# Altium PCB lipo_board.PcbDoc
Units mil, origin at the board's own origin, x right, y up, seen from the top; angles counter-clockwise.
Board outline 2800 x 2800 mil, 2 copper layers (Top Layer, Bottom Layer); 8 components, 8 nets, 32 pads, 0 vias.
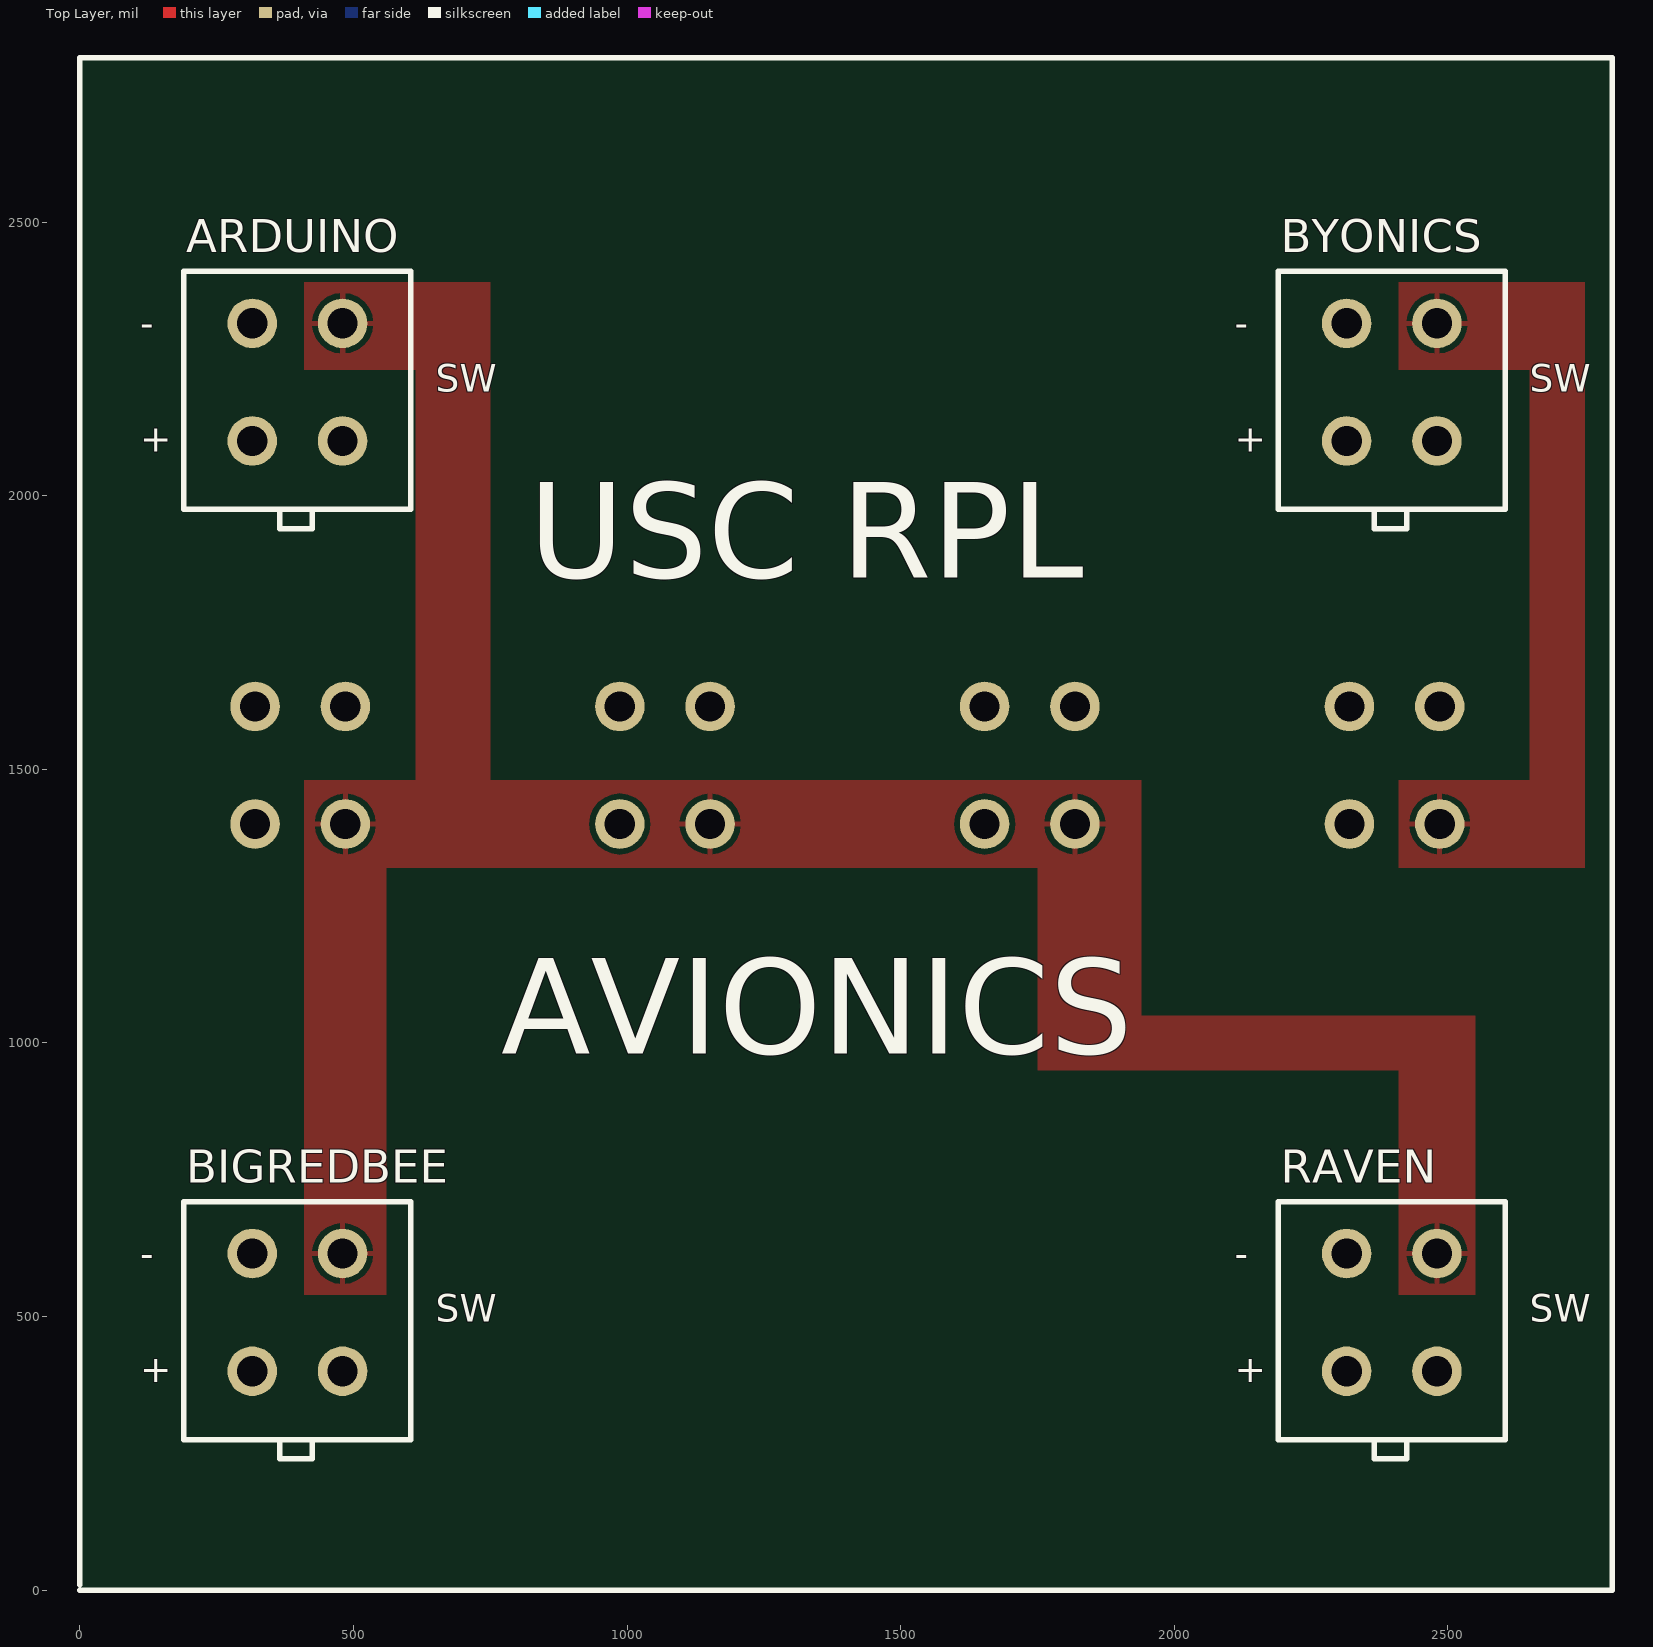
[diagram p0: Top Layer view]
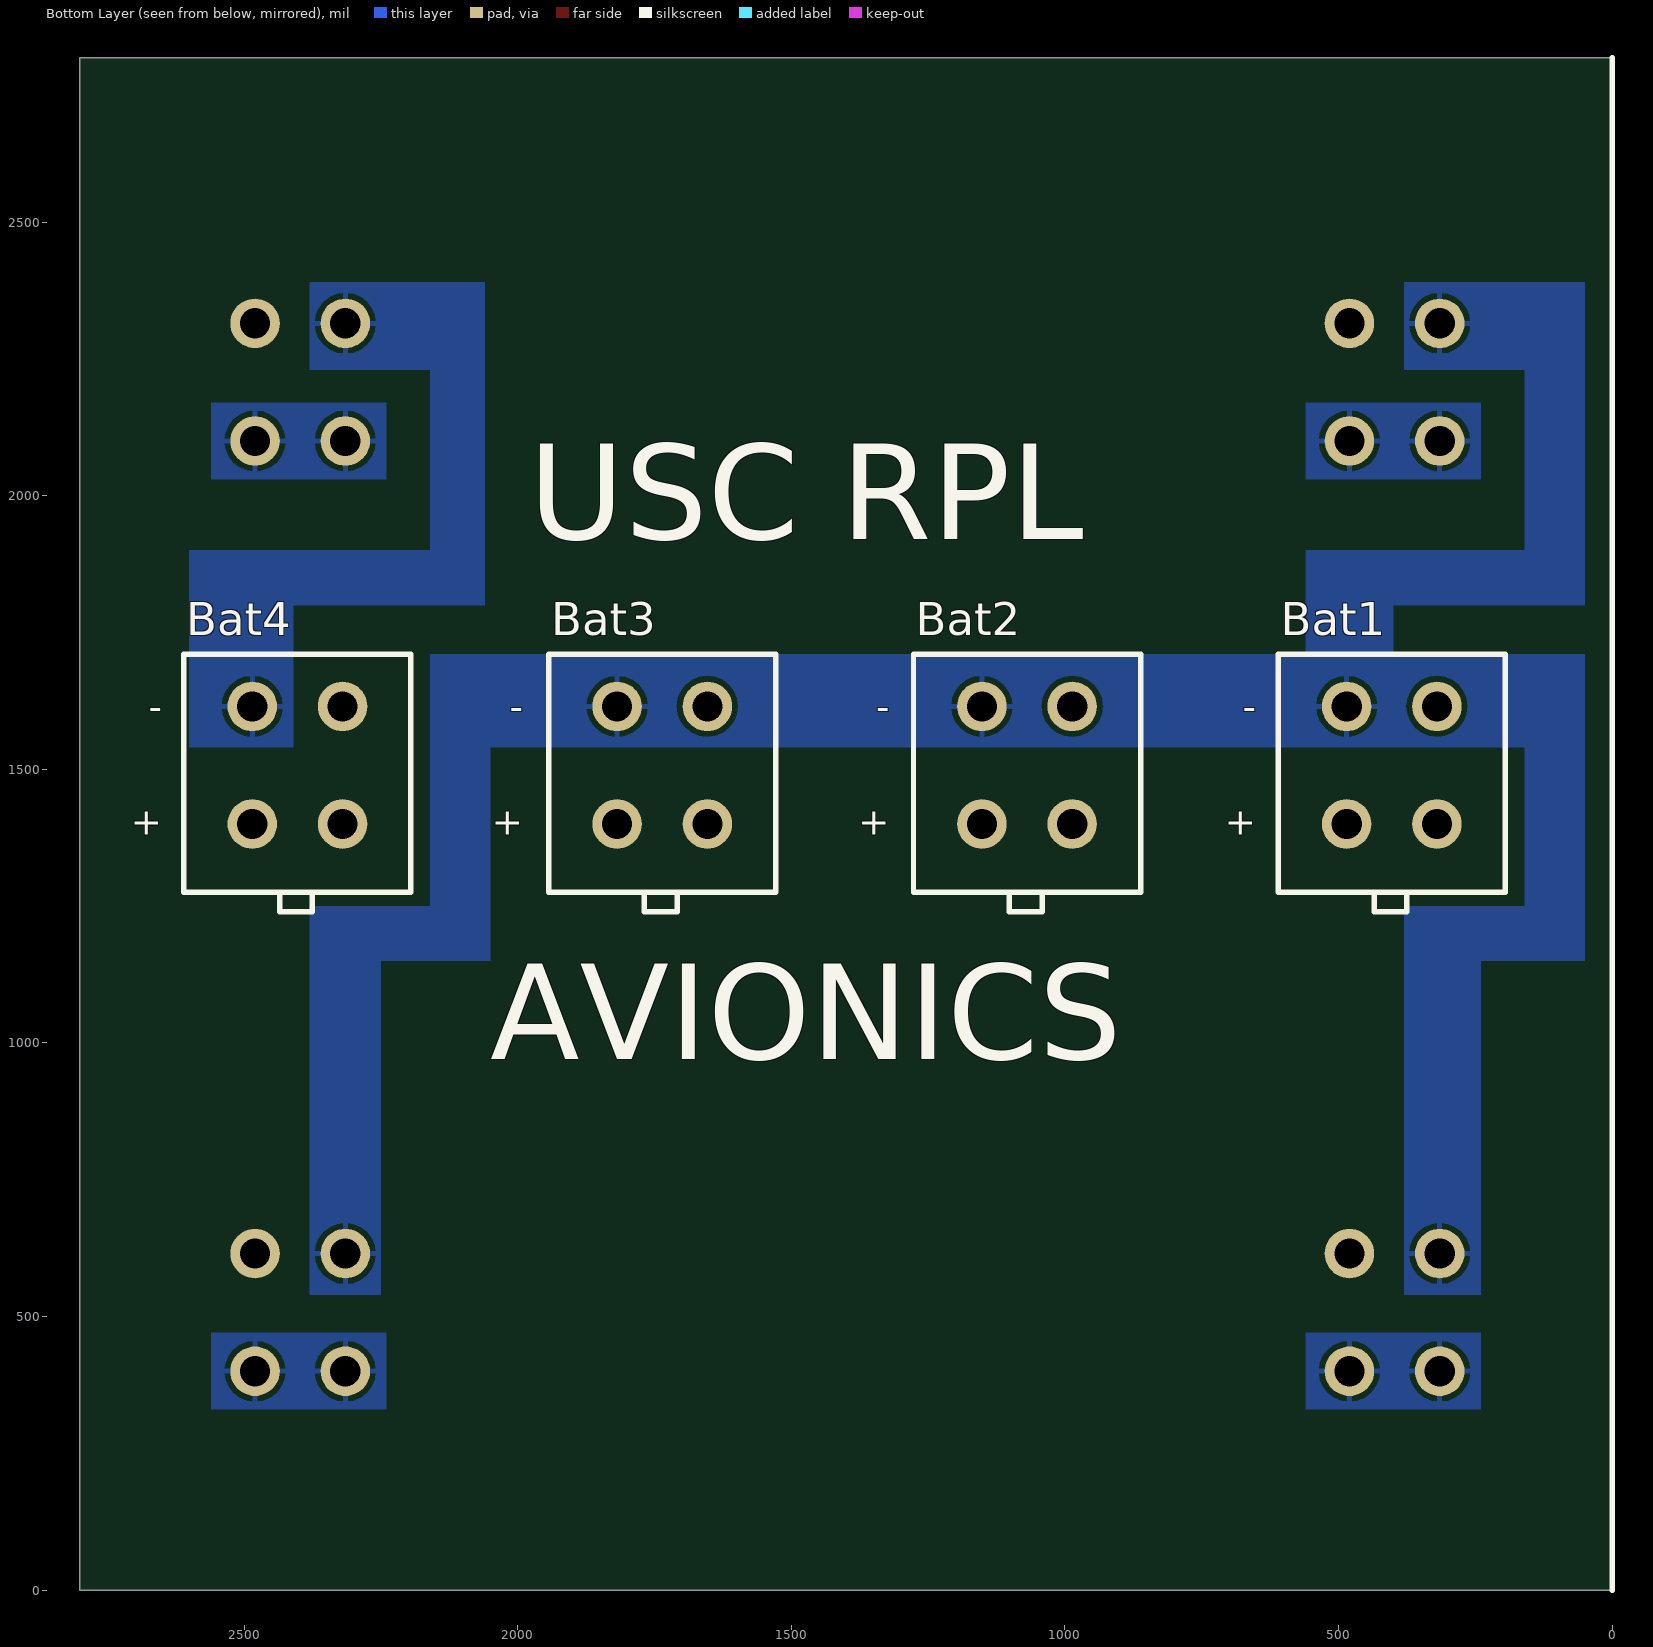
[diagram p1: Bottom Layer view, seen from below]
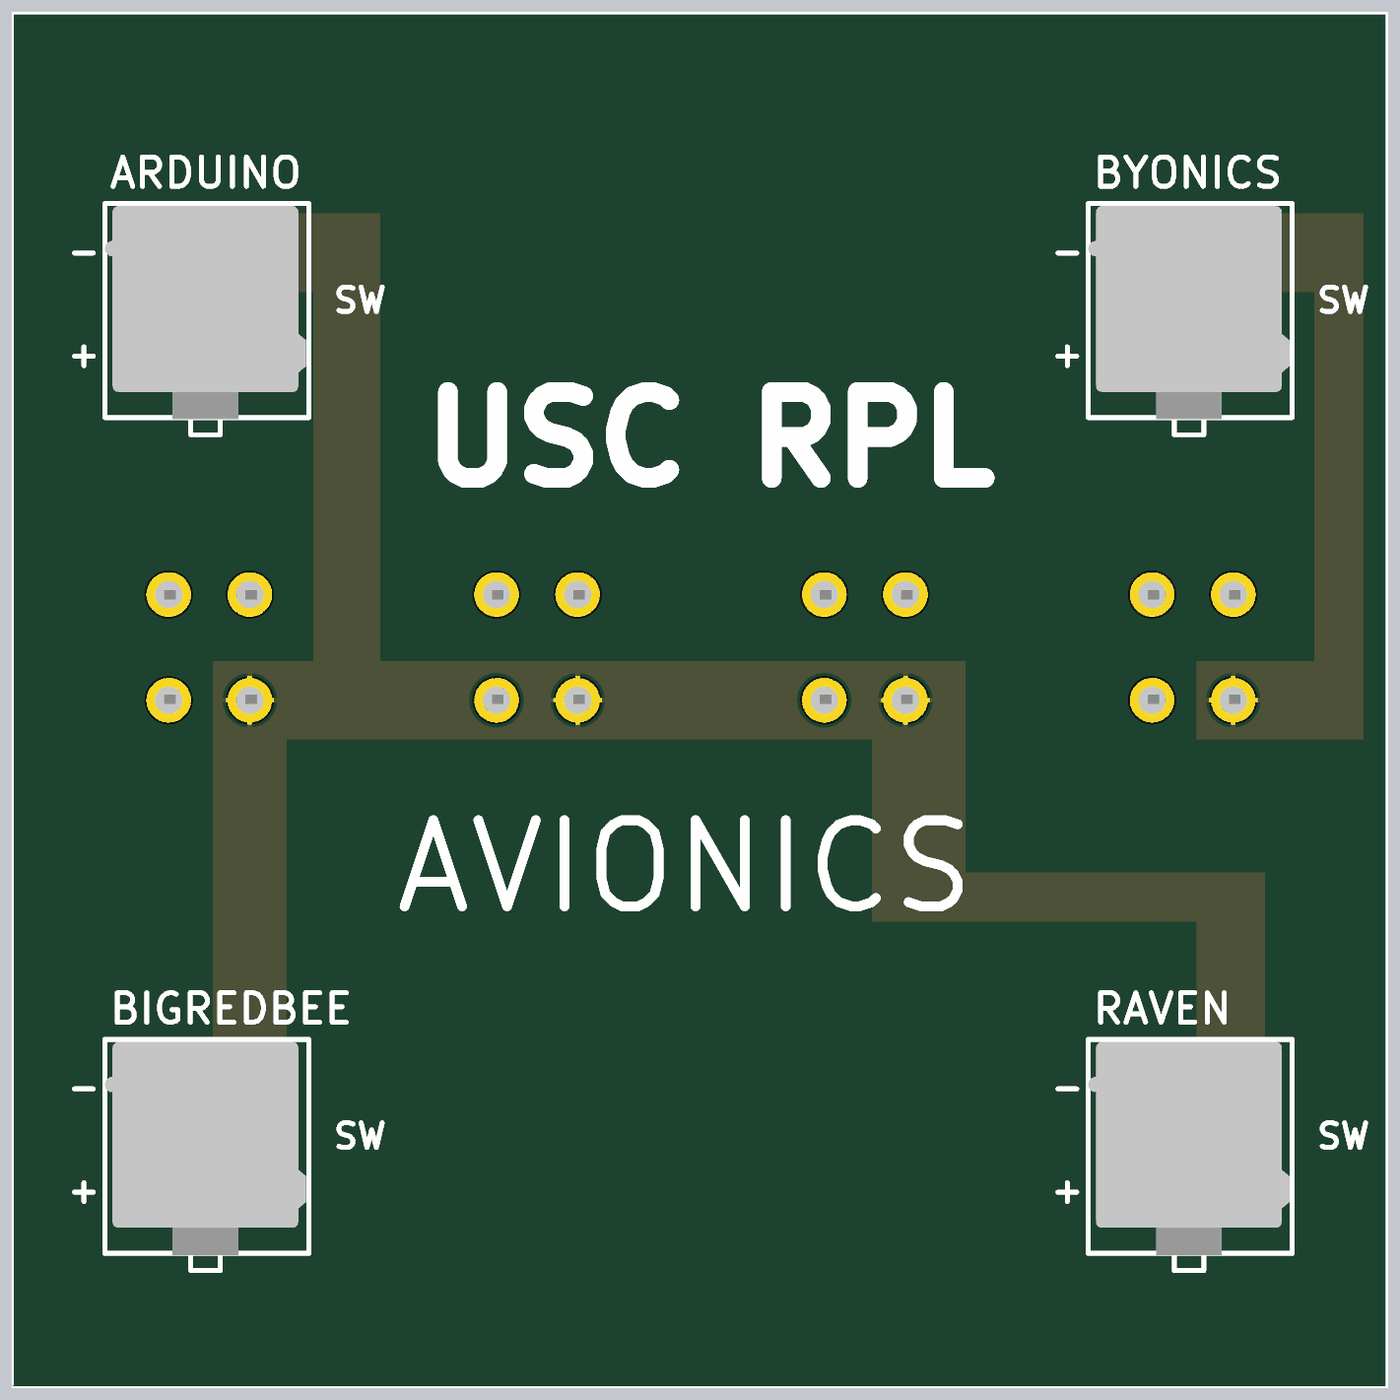
[diagram p2: 3D render of the assembled board from above, using the file's embedded part models]
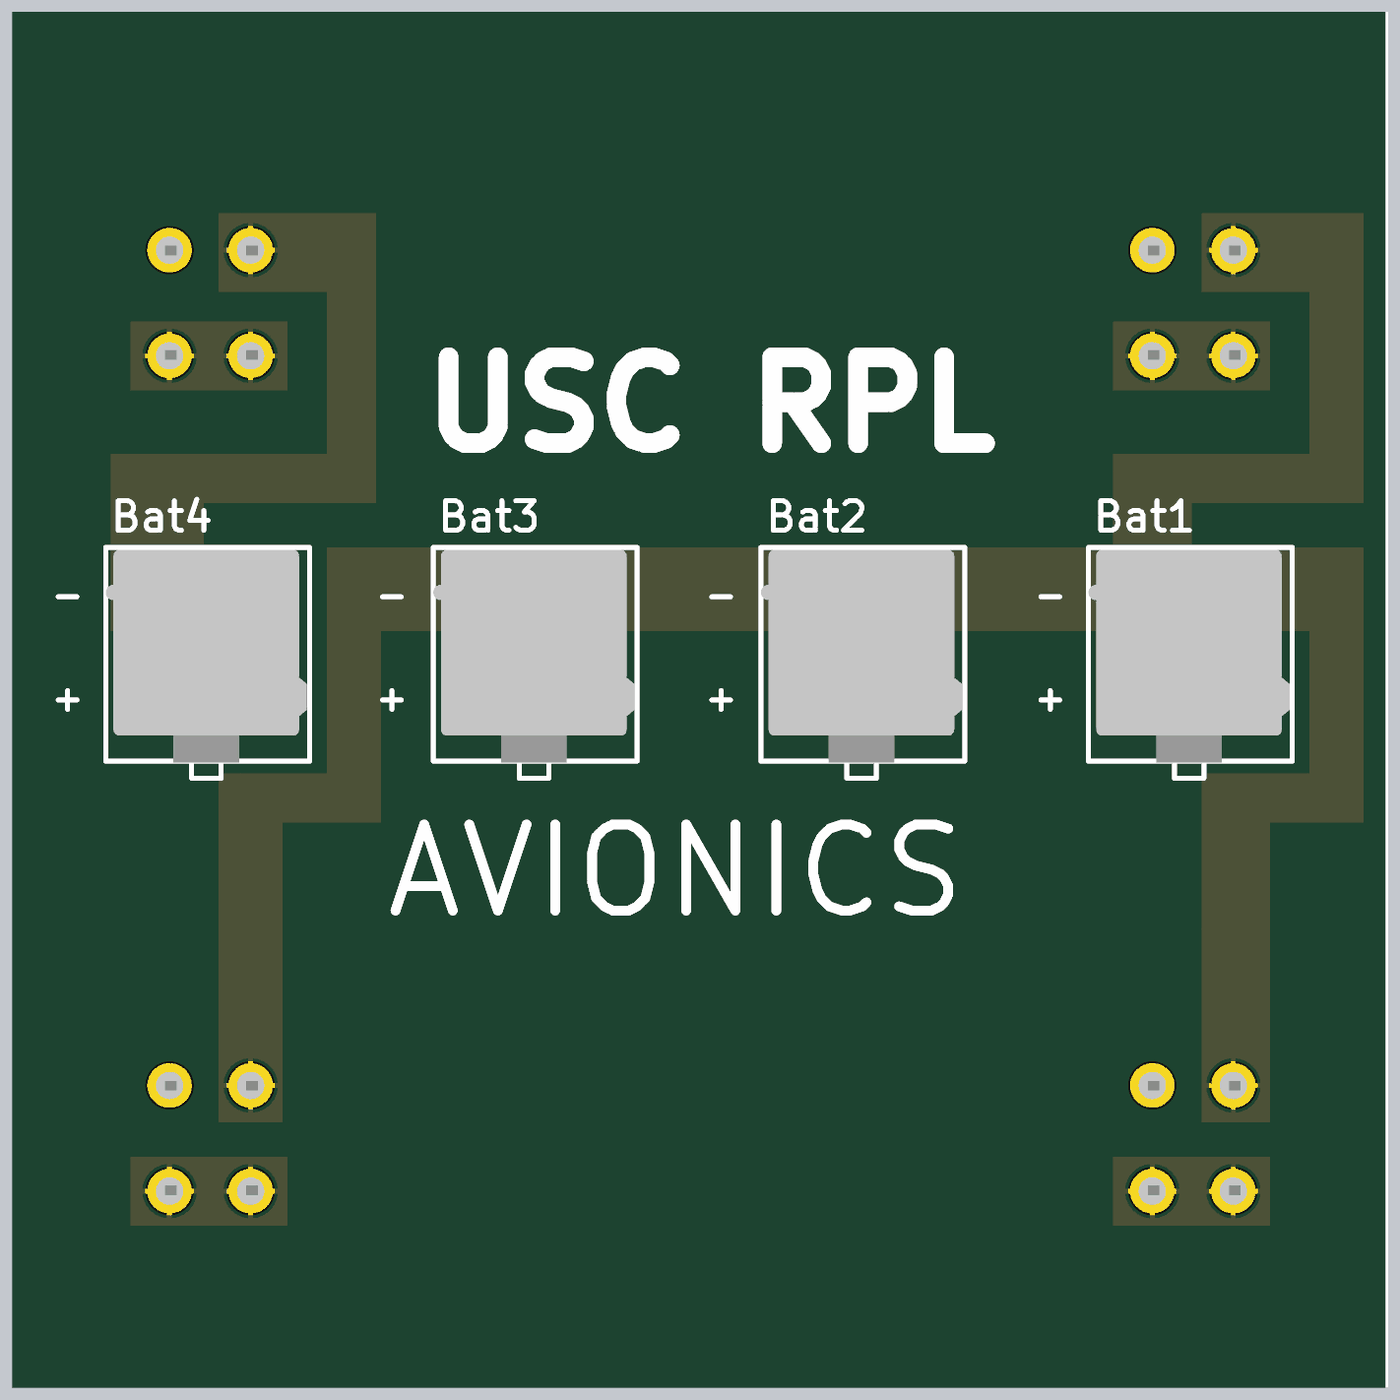
[diagram p3: 3D render of the assembled board from below, using the file's embedded part models]

## Layer stack, top to bottom
Top Layer: signal copper 1.4
Dielectric: dielectric 12.6, FR-4, Dk 4.8
Bottom Layer: signal copper 1.4

## Board outline
0,0 0,2800 2800,2800 2800,0 0,0

## Design rules (kind name [scope] priority, off if disabled: settings)
Clearance [All] p1: gap=10
PolygonConnect [All] p1: connectstyle=Relief reliefconductorwidth=10 reliefentries=4 polygonreliefangle="90 Angle"
RoomDefinition lipo_board [InComponentClass('lipo_board')] p1: confinementstyle=ConfineIn formatcopy=TRUE lockcomponents=FALSE outline 0,0 7595,0 7595,5155 0,5155
RoutingVias [All] p1: holewidth=28 width=50 viastyle="Through Hole" minholewidth=28 minwidth=50 maxholewidth=28 maxwidth=50
SilkscreenOverComponentPads [All] p1: minsilkscreentomaskgap=10
SolderMaskExpansion [All] p1: expansion=4
TestPointUsage [All] p1: valid=0 allowmultiple=FALSE
Testpoint [All] p1: side=15 testpointundercomponent=TRUE minsize=40 maxsize=100 preferedsize=60 minholesize=0 maxholesize=40 preferedholesize=32 testpointgrid=1 style=1023 order=0123456789
Width [All] p1: maxlimit=10 minlimit=10 preferedwidth=10
23 further rules are at their usual default settings.

## Components (designator, comment, footprint, x,y, rotation, side; value= is the part's Value field where it differs from the comment)
ARDUINO "5566-4" 5566-4 400,2100 r0 top
Bat1 "5566-4" 5566-4 400,1400 r180 bottom
Bat2 "5566-4" 5566-4 1066.67,1400 r180 bottom
Bat3 "5566-4" 5566-4 1733.33,1400 r180 bottom
Bat4 "5566-4" 5566-4 2400,1400 r180 bottom
BIGREDBEE "5566-4" 5566-4 400,400 r0 top
BYONICS "5566-4" 5566-4 2400,2100 r0 top
RAVEN "5566-4" 5566-4 2400,400 r0 top

## Footprints (in the part's own frame and the unit in brackets; to place one, negate y for a bottom-side part, rotate by r counter-clockwise, add the part's x,y. Pads: shape width x height; smd on the part's side, far side on the other; paste and mask are expansions set on the pad)
5566-4 [mm]
  round 2.3 hole 1.4: 1(-2.159,0) 2(2.032,0) 3(2.032,5.461) 4(-2.159,5.461)
  silkscreen extent -5.33,-4.06 5.21,7.87, body extent -5.33,-3.25 5.07,7.75, height 12.8

## Part data
ARDUINO Bat1 Bat2 Bat3 Bat4 BIGREDBEE BYONICS RAVEN: "4.20mm (.165\") Pitch Mini-Fit Jr.™ Header, Dual Row, Vertical, without Snap-in Plastic Peg PCB Lock, 4 Circuits, PA Polyamide Nylon 6/6 94V-2, Tin (Sn) Plating, without Drain Holes"

## Nets (pads, with @x,y where several pads share a name; then routed paths per layer and width w, separated by ;. In a path a pad name is that pad's centre, name@x,y a point inside that pad or via, vN(x,y) a via of type N, cw(c..) or ccw(c..) an arc to the next point about the centre after c; other vN are vias at no path point)
ARD+: ARDUINO.1 ARDUINO.2
ARD-: ARDUINO.4 Bat1.4 Bat2.4 Bat3.4 BIGREDBEE.4 RAVEN.4
BAT1+: ARDUINO.3 Bat1.1 Bat2.1 Bat3.1 BIGREDBEE.3 RAVEN.3
BAT4+: Bat4.1 BYONICS.3
BAT4-: Bat4.4 BYONICS.4
BIG+: BIGREDBEE.1 BIGREDBEE.2
BYO+: BYONICS.1 BYONICS.2
RAV+: RAVEN.1 RAVEN.2
pads on no net: Bat1.2 Bat1.3 Bat2.2 Bat2.3 Bat3.2 Bat3.3 Bat4.2 Bat4.3

## Polygon pours and split planes (outlines as drawn)
BAT1+ on Top Layer "Bottom Layer-No Net" (solid, pour order 1005): 1750,1480 1750,950 2410,950 2410,540 2550,540 2550,1050 1940,1050 1940,1480 1750,1480
BAT4+ on Top Layer "Bottom Layer-No Net" (solid, pour order 1004): 2410,2390 2750,2390 2750,1320 2410,1320 2410,1480 2650,1480 2650,2230 2410,2230 2410,2390
BAT1+ on Top Layer "Bottom Layer-No Net" (solid, pour order 1003): 560,1480 410,1480 410,540 560,540 560,1480
BAT1+ on Top Layer "Bottom Layer-No Net" (solid, pour order 1002): 410,1480 1940,1480 1940,1320 410,1320 410,1480
BAT1+ on Top Layer "Bottom Layer-No Net" (solid, pour order 1001): 480,2390 410,2390 410,2230 480,2230 480,2390
BAT1+ on Top Layer "Bottom Layer-No Net" (solid, pour order 1000): 419.71,2390 419.71,2230 614,2230 614,1480 410,1480 410,1320 740.29,1320 750,1330 750,2390 419.71,2390
ARD- on Bottom Layer "Bottom Layer-No Net" (solid, pour order 1014): 2380,540 2250,540 2250,1150 2050,1150 2050,1540 1750,1540 1750,1710 2160,1710 2160,1250 2380,1250 2380,540
ARD- on Bottom Layer "Bottom Layer-No Net" (solid, pour order 1013): 380,2390 380,2230 160,2230 160,1900 560,1900 560,1540 400,1540 400,1800 50,1800 50,2390 380,2390
BAT4- on Bottom Layer "Bottom Layer-No Net" (solid, pour order 1012): 2380,2390 2380,2230 2170,2230 2160,2230 2160,1900 2600,1900 2610,1900 2600,1900 2600,1540 2410,1540 2410,1800 2060,1800 2060,2390 2380,2390
ARD- on Bottom Layer "Bottom Layer-No Net" (solid, pour order 1011): 380,540 240,540 240,1150 50,1150 50,1710 610,1710 610,1540 160,1540 160,1250 380,1250 380,540
ARD- on Bottom Layer "Bottom Layer-No Net" (solid, pour order 1010): 410,1540 410,1710 1940,1710 1940,1540 410,1540
RAV+ on Bottom Layer "Bottom Layer-No Net" (solid, pour order 1009): 2240,470 2560,470 2560,330 2240,330 2240,470
BIG+ on Bottom Layer "Bottom Layer-No Net" (solid, pour order 1008): 240,470 560,470 560,330 240,330 240,470
BYO+ on Bottom Layer "Bottom Layer-No Net" (solid, pour order 1007): 2240,2170 2560,2170 2560,2030 2240,2030 2240,2170
ARD+ on Bottom Layer "Bottom Layer-No Net" (solid, pour order 1006): 240,2170 560,2170 560,2030 240,2030 240,2170

## Silkscreen, mask and mechanical layers (free items; w line width, h text height)
Top Overlay:
  lines w10: 0,0 2800,0 2800,2800 0,2800 0,10
  text "-" at 110,2290 h50
  text "-" at 2110,2290 h50
  text "SW" at 650,2190 h50
  text "SW" at 2650,2190 h50
  text "+" at 110,2080 h50
  text "+" at 2110,2080 h50
  text "USC RPL" at 820,1850 h175
  text "AVIONICS" at 770,980 h175
  text "-" at 110,590 h50
  text "-" at 2110,590 h50
  text "SW" at 650,490 h50
  text "SW" at 2650,490 h50
  text "+" at 110,380 h50
  text "+" at 2110,380 h50
Bottom Overlay:
  lines w10: 0,0 0,2800
  text "USC RPL" at 1980,1920 h175
  text "-" at 650,1590 h50
  text "-" at 1320,1590 h50
  text "-" at 1990,1590 h50
  text "-" at 2650,1590 h50
  text "+" at 650,1380 h50
  text "+" at 1320,1380 h50
  text "+" at 1990,1380 h50
  text "+" at 2650,1380 h50
  text "AVIONICS" at 2050,970 h175